# EAGLE board CPU_Board_Layout (EAGLE 7.6.0)
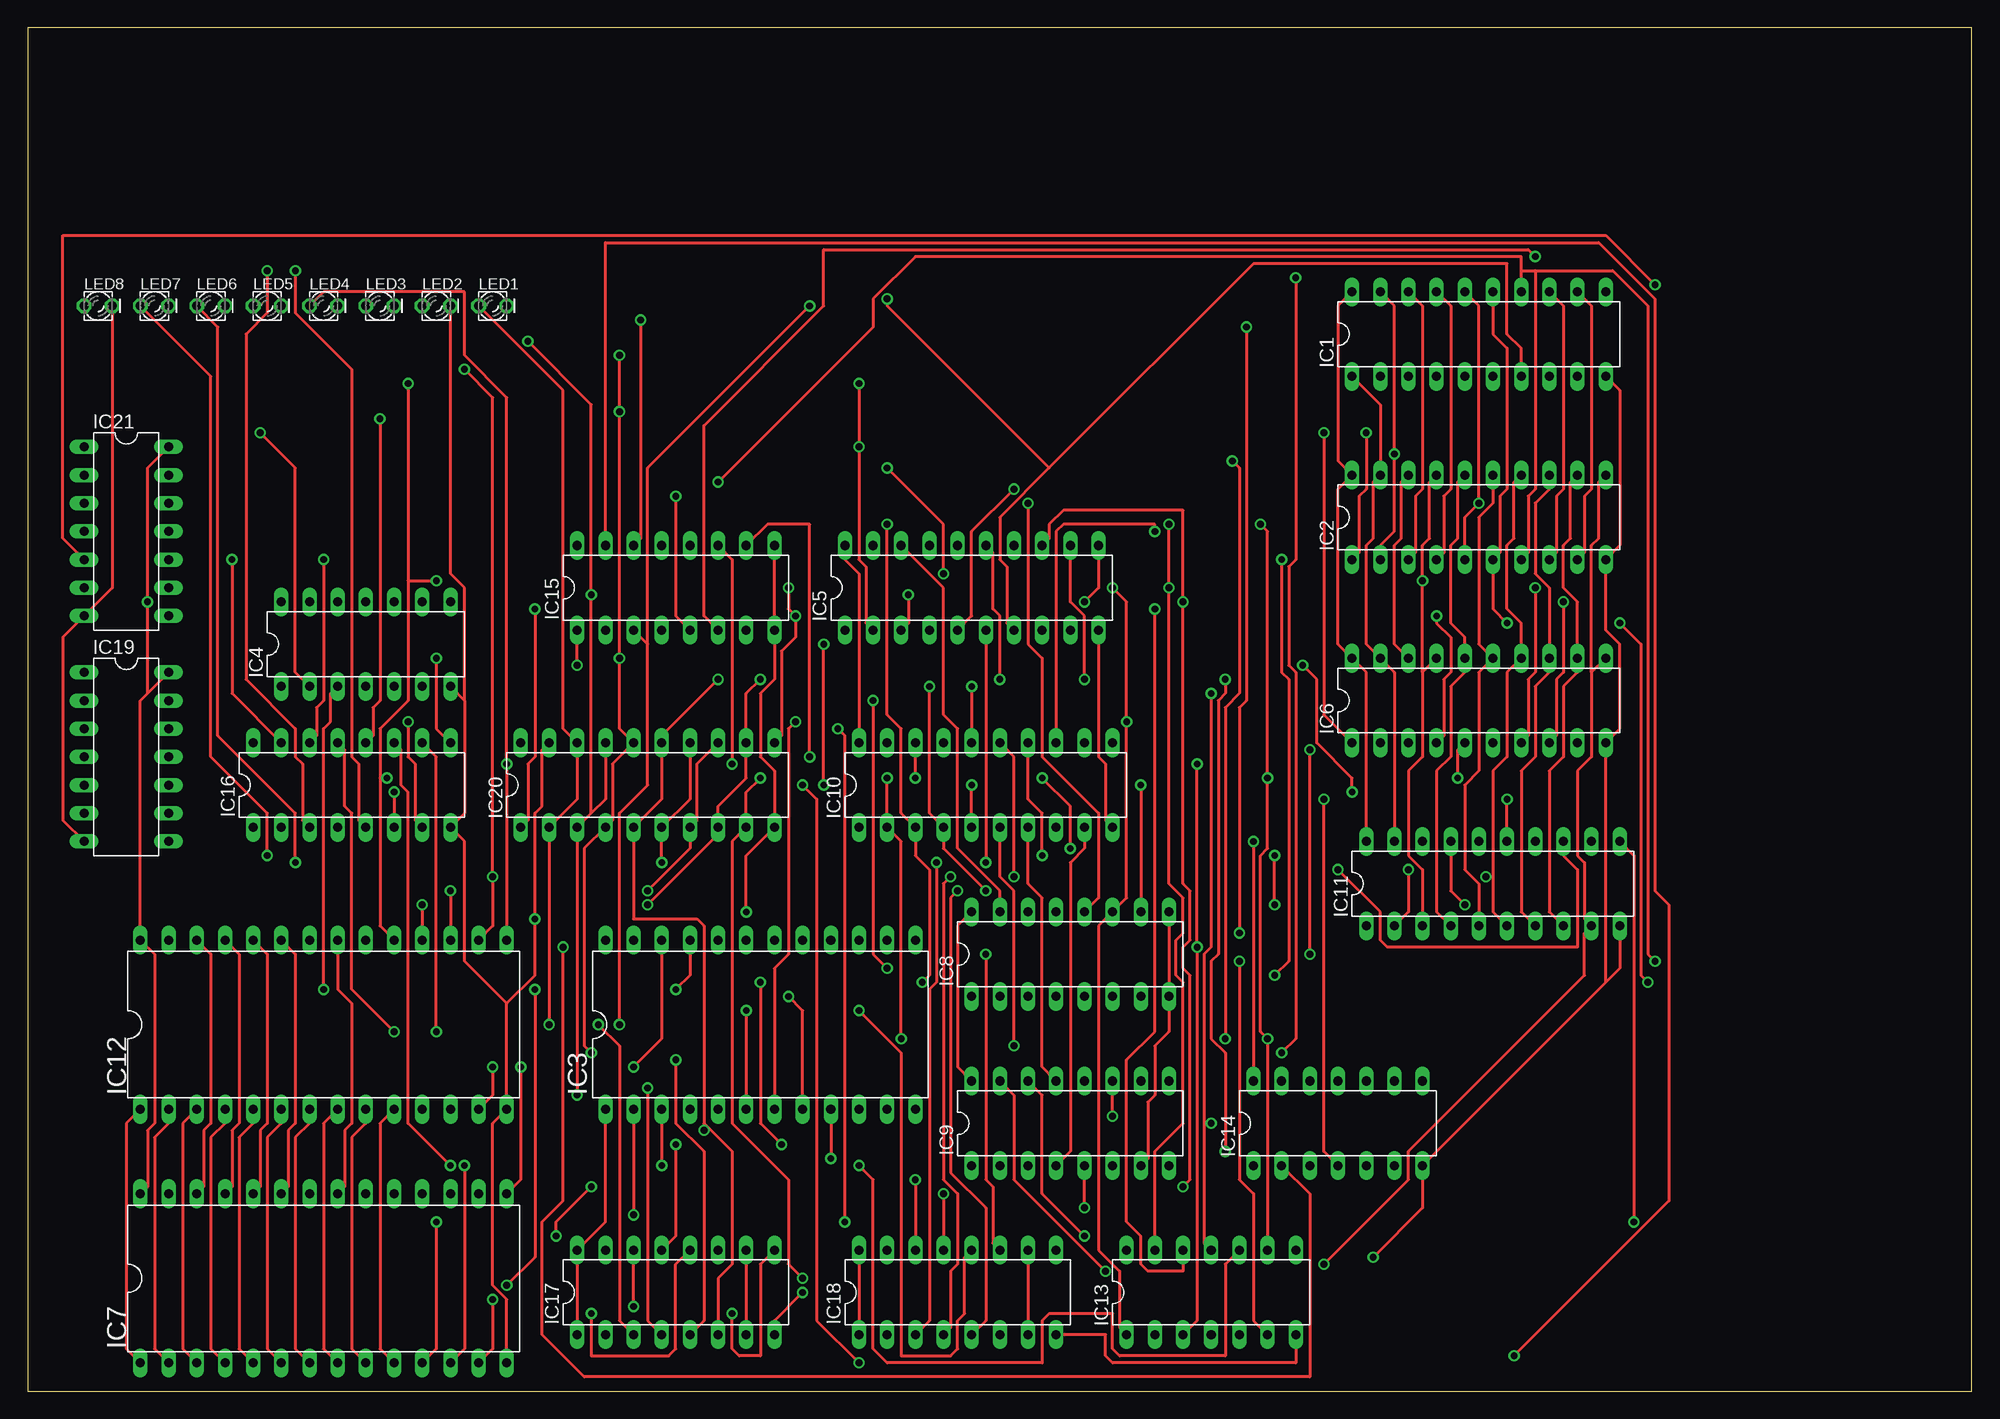
[diagram p0: board, top side]
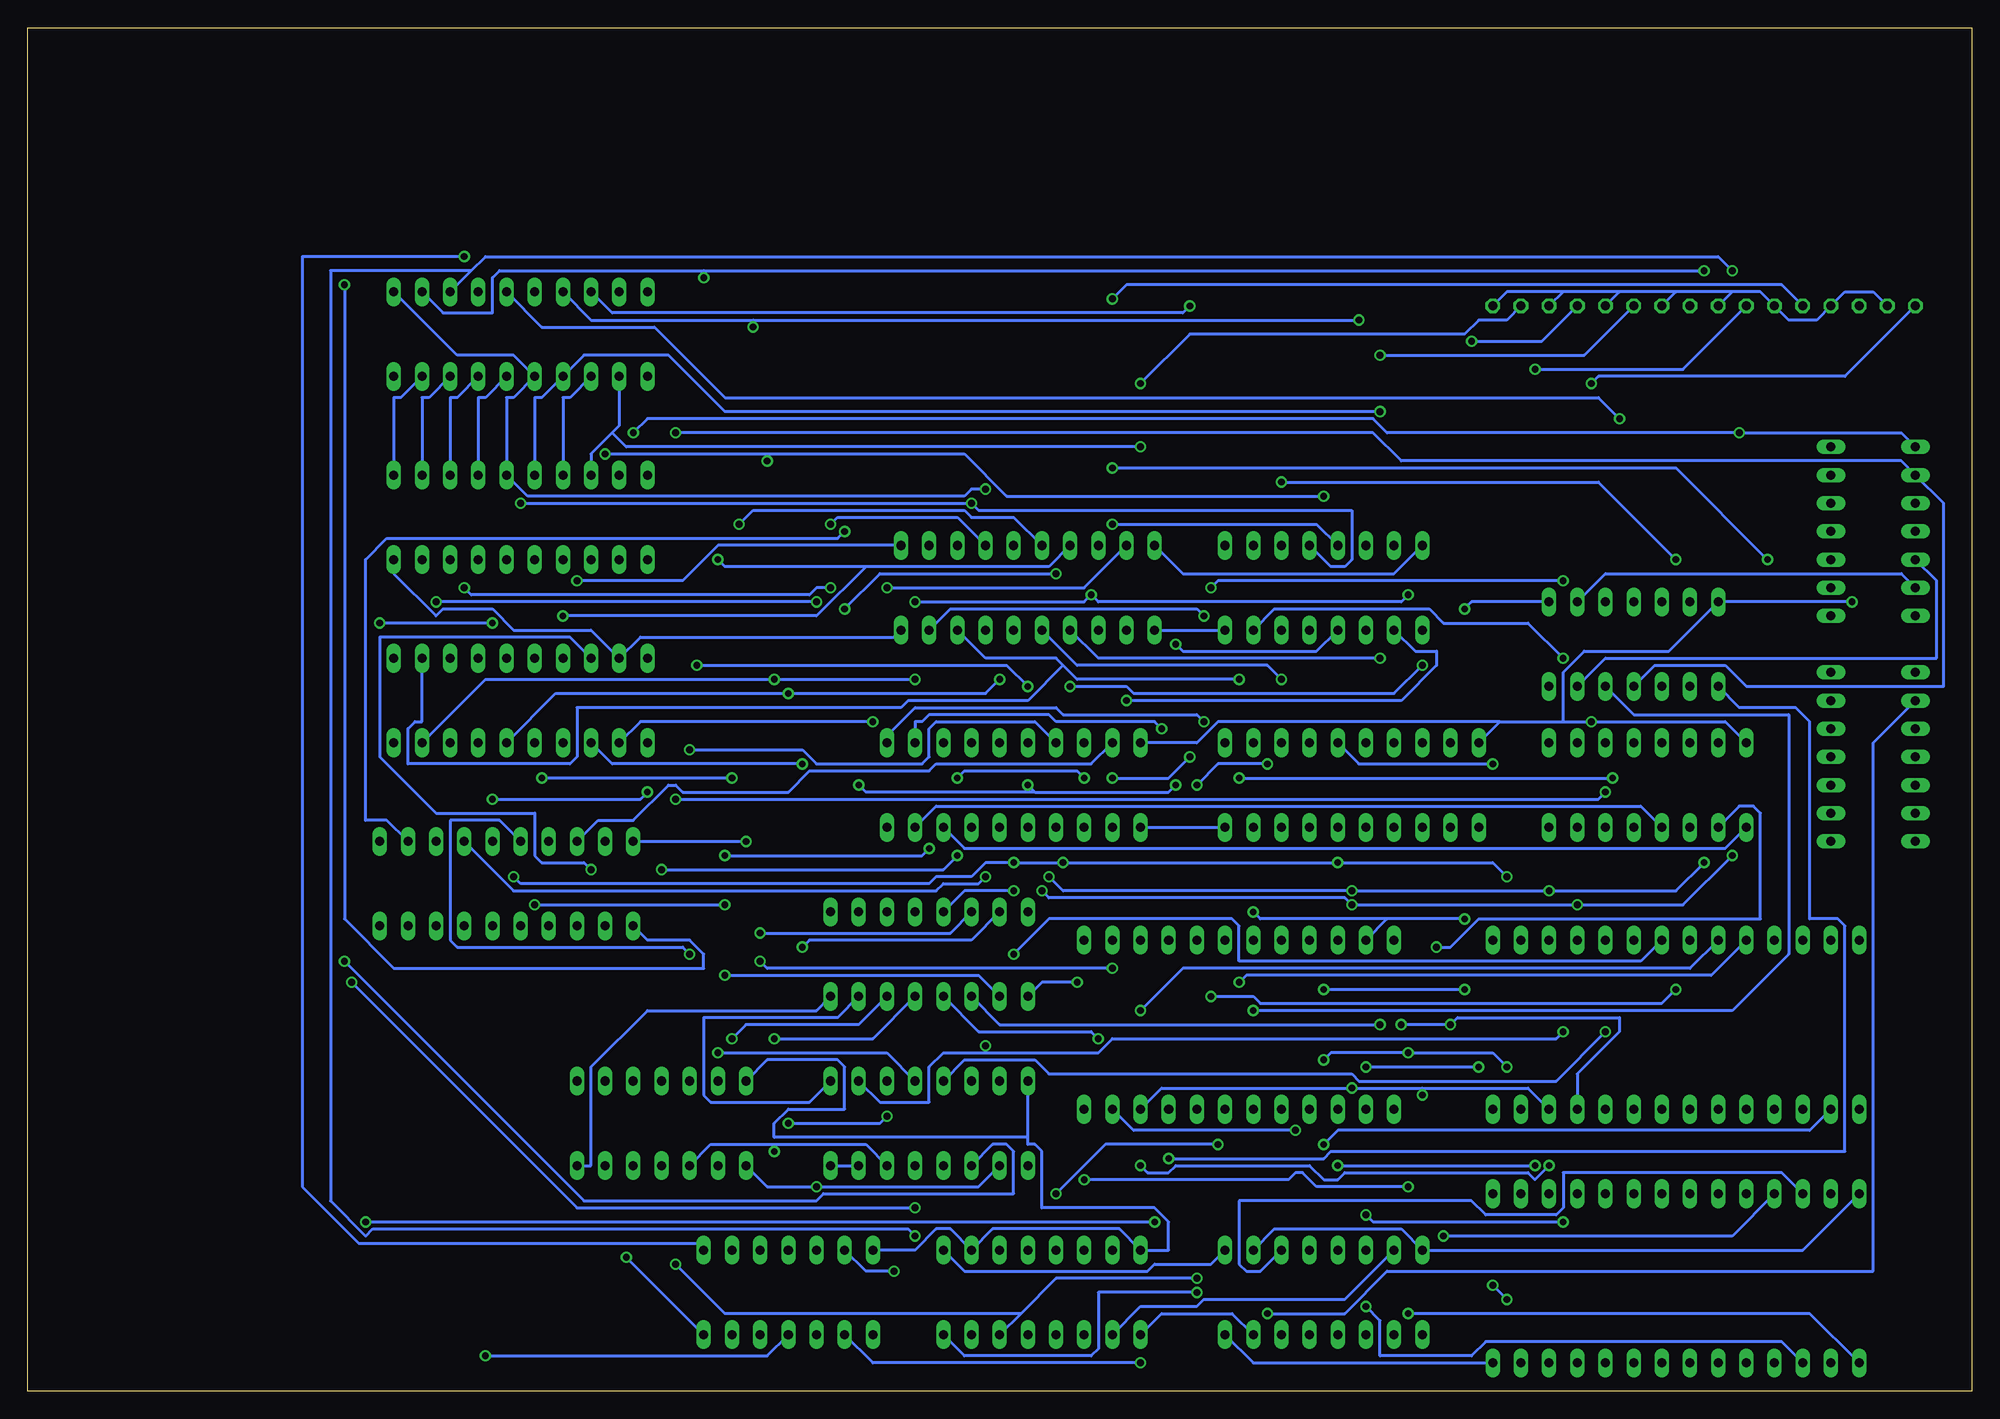
[diagram p1: board, bottom side, seen from below]

Size 175.24 x 122.86 mm. Coordinates in mm from the lower left corner, seen from the top.
Outline: 0,0 175.24,0 175.24,122.86 0,122.86 0,0
Copper layers (1*16): Top 0.035mm / dielectric 1.5mm / Bottom 0.035mm
Design rules "default": minimum track width 10mil, minimum drill 24mil, track to track 8mil, track to pad 8mil, pad to pad 8mil, via to via 8mil, smd to smd 8mil, copper to edge 40mil, drill to drill 8mil, minimum pad ring 10mil, minimum via ring 8mil, stop-mask expansion 4mil, vias tented up to drill 0mil, thermal gap 10mil

## Footprints (pad centres in the part's own frame; a part is rotated, then mirrored left to right if it is on the bottom)
DIL20 = drill 0.813 long: 1 -11.43,-3.81; 2 -8.89,-3.81; 3 -6.35,-3.81; 4 -3.81,-3.81; 5 -1.27,-3.81; 6 1.27,-3.81; 7 3.81,-3.81; 8 6.35,-3.81; 9 8.89,-3.81; 10 11.43,-3.81; 11 11.43,3.81; 12 8.89,3.81; 13 6.35,3.81; 14 3.81,3.81; 15 1.27,3.81; 16 -1.27,3.81; 17 -3.81,3.81; 18 -6.35,3.81; 19 -8.89,3.81; 20 -11.43,3.81
DIL24-6 = drill 0.813 long: 1 -13.97,-7.62; 2 -11.43,-7.62; 3 -8.89,-7.62; 4 -6.35,-7.62; 5 -3.81,-7.62; 6 -1.27,-7.62; 7 1.27,-7.62; 8 3.81,-7.62; 9 6.35,-7.62; 10 8.89,-7.62; 11 11.43,-7.62; 12 13.97,-7.62; 13 13.97,7.62; 14 11.43,7.62; 15 8.89,7.62; 16 6.35,7.62; 17 3.81,7.62; 18 1.27,7.62; 19 -1.27,7.62; 20 -3.81,7.62; 21 -6.35,7.62; 22 -8.89,7.62; 23 -11.43,7.62; 24 -13.97,7.62
DIL14 = drill 0.813 long: 1 -7.62,-3.81; 2 -5.08,-3.81; 3 -2.54,-3.81; 4 0,-3.81; 5 2.54,-3.81; 6 5.08,-3.81; 7 7.62,-3.81; 8 7.62,3.81; 9 5.08,3.81; 10 2.54,3.81; 11 0,3.81; 12 -2.54,3.81; 13 -5.08,3.81; 14 -7.62,3.81
DIL28-6 = drill 0.813 long: 1 -16.51,-7.62; 2 -13.97,-7.62; 3 -11.43,-7.62; 4 -8.89,-7.62; 5 -6.35,-7.62; 6 -3.81,-7.62; 7 -1.27,-7.62; 8 1.27,-7.62; 9 3.81,-7.62; 10 6.35,-7.62; 11 8.89,-7.62; 12 11.43,-7.62; 13 13.97,-7.62; 14 16.51,-7.62; 15 16.51,7.62; 16 13.97,7.62; 17 11.43,7.62; 18 8.89,7.62; 19 6.35,7.62; 20 3.81,7.62; 21 1.27,7.62; 22 -1.27,7.62; 23 -3.81,7.62; 24 -6.35,7.62; 25 -8.89,7.62; 26 -11.43,7.62; 27 -13.97,7.62; 28 -16.51,7.62
DIL16 = drill 0.813 long: 1 -8.89,-3.81; 2 -6.35,-3.81; 3 -3.81,-3.81; 4 -1.27,-3.81; 5 1.27,-3.81; 6 3.81,-3.81; 7 6.35,-3.81; 8 8.89,-3.81; 9 8.89,3.81; 10 6.35,3.81; 11 3.81,3.81; 12 1.27,3.81; 13 -1.27,3.81; 14 -3.81,3.81; 15 -6.35,3.81; 16 -8.89,3.81
LED_LD260 = drill 0.813 octagon: A -1.27,0; K 1.27,0

## Placement (x,y rotation side)
IC1  74HC574N  [DIL20]  130.81,95.25 0 top
IC2  74LS541N  [DIL20]  130.81,78.74 0 top
IC3  4514N  [DIL24-6]  66.04,33.02 0 top
IC4  74LS04N  [DIL14]  30.48,67.31 0 top
IC5  74HC574N  [DIL20]  85.09,72.39 0 top
IC6  74LS541N  [DIL20]  130.81,62.23 0 top
IC7  CY62256LL-PC  [DIL28-6]  26.67,10.16 0 top
IC8  74S283N  [DIL16]  93.98,39.37 0 top
IC9  74S283N  [DIL16]  93.98,24.13 0 top
IC10  74HC574N  [DIL20]  86.36,54.61 0 top
IC11  74LS541N  [DIL20]  132.08,45.72 0 top
IC12  CY62256LL-PC  [DIL28-6]  26.67,33.02 0 top
IC13  74AS04N  [DIL14]  106.68,8.89 0 top
IC14  74AS04N  [DIL14]  118.11,24.13 0 top
IC15  74S283N  [DIL16]  58.42,72.39 0 top
IC16  74S283N  [DIL16]  29.21,54.61 0 top
IC17  [DIL16]  58.42,8.89 0 top
IC18  [DIL16]  83.82,8.89 0 top
IC19  74ALS04N  [DIL14]  8.89,57.15 270 top
IC20  74LS541N  [DIL20]  55.88,54.61 0 top
IC21  74LS08N  [DIL14]  8.89,77.47 270 top
LED1  [LED_LD260]  41.91,97.79 0 top
LED2  [LED_LD260]  36.83,97.79 0 top
LED3  [LED_LD260]  31.75,97.79 0 top
LED4  [LED_LD260]  26.67,97.79 0 top
LED5  [LED_LD260]  21.59,97.79 0 top
LED6  [LED_LD260]  16.51,97.79 0 top
LED7  [LED_LD260]  11.43,97.79 0 top
LED8  [LED_LD260]  6.35,97.79 0 top

## Library data of the parts
IC1 IC2 IC4-IC6 IC8-IC11 IC13-IC16 IC19-IC21 = 74xx-us
IC3 = 45xx
IC7 IC12 = memory-sram
IC17 IC18 = ic-package
LED1-LED8 = eagle-ltspice; SPICEMODEL: NONE; SPICEPREFIX: D; SPICETYPE: diode

## Nets
BUS0: IC1.2 IC2.18 IC5.2 IC6.18 IC11.2 IC12.11 IC17.3 IC20.2 IC20.18 LED1.A
BUS1: IC1.3 IC2.17 IC3.10 IC5.3 IC5.11 IC6.17 IC11.3 IC12.12 IC17.4 IC20.3 IC20.17 LED2.A
BUS2: IC1.4 IC2.16 IC5.4 IC6.16 IC11.4 IC12.13 IC17.5 IC20.4 IC20.16 LED3.A
BUS3: IC1.5 IC1.11 IC2.15 IC3.11 IC5.5 IC6.15 IC11.5 IC12.15 IC17.6 IC20.5 IC20.15 LED4.A
BUS4: IC1.6 IC2.14 IC5.6 IC6.14 IC11.6 IC12.16 IC18.3 IC20.6 IC20.14 LED5.A
BUS5: IC1.7 IC2.13 IC5.7 IC6.13 IC11.7 IC12.17 IC18.4 IC20.7 IC20.13 LED6.A
BUS6: IC1.8 IC2.12 IC5.8 IC6.12 IC11.8 IC12.18 IC18.5 IC20.8 IC20.12 LED7.A
BUS7: IC1.9 IC2.11 IC5.9 IC6.11 IC11.9 IC12.19 IC18.6 IC20.9 IC20.11 LED8.A
GND: IC1.1 IC1.10 IC2.10 IC2.19 IC3.23 IC4.7 IC5.1 IC5.10 IC6.10 IC6.19 IC7.14 IC8.8 IC8.9 IC9.7 IC9.8 IC10.1 IC10.10 IC11.10 IC11.19 IC12.14 IC13.7 IC14.7 IC15.8 IC15.9 IC16.8 IC17.8 IC18.8 IC19.7 IC20.10 IC20.19 IC21.7 LED1.K LED2.K LED3.K LED4.K LED5.K LED6.K LED7.K LED8.K
N$1: IC1.19 IC2.2 IC8.5 IC15.5
N$2: IC1.18 IC2.3 IC8.3 IC15.3
N$3: IC1.17 IC2.4 IC8.14 IC15.14
N$4: IC1.16 IC2.5 IC8.12 IC15.12
N$5: IC1.15 IC2.6 IC9.5 IC16.12
N$6: IC1.14 IC2.7 IC9.3 IC16.14
N$7: IC1.13 IC2.8 IC9.14 IC16.3
N$8: IC1.12 IC2.9 IC9.12 IC16.5
N$9: IC3.2 IC7.11
N$10: IC3.3 IC7.12
N$11: IC3.21 IC7.13
N$12: IC3.22 IC7.15
N$13: IC3.9 IC4.1
N$14: IC2.1 IC4.2 IC21.1
N$15: IC13.2 IC15.11
N$16: IC13.4 IC15.15
N$17: IC5.17 IC6.4 IC8.2
N$18: IC5.16 IC6.5 IC8.6 IC13.9
N$19: IC5.15 IC6.6 IC9.11 IC13.11
N$20: IC5.14 IC6.7 IC9.15 IC13.13
N$21: IC5.13 IC6.8 IC9.2 IC14.1
N$22: IC13.5
N$23: IC4.4 IC6.1 IC21.2
N$24: IC3.8 IC4.3
N$26: IC8.7 IC9.9
N$27: IC8.4 IC10.2 IC15.10
N$28: IC8.1 IC10.3 IC15.13
N$29: IC8.13 IC10.4 IC15.1
N$30: IC8.10 IC10.5 IC15.4
N$31: IC9.10 IC10.6 IC16.10
N$32: IC9.13 IC10.7 IC16.13
N$33: IC10.8 IC16.1
N$34: IC9.4 IC10.9 IC16.4
N$35: IC10.19 IC11.18
N$36: IC10.18 IC11.17
N$37: IC10.17 IC11.16
N$38: IC10.16 IC11.15
N$39: IC10.15 IC11.14
N$40: IC10.14 IC11.13
N$41: IC10.13 IC11.12
N$42: IC10.12 IC11.11
N$43: IC3.7 IC10.11
N$44: IC3.6 IC4.5
N$45: IC4.6 IC11.1 IC21.5
N$46: IC7.21 IC12.21 IC18.11
N$47: IC7.23 IC12.23 IC18.12
N$48: IC7.24 IC12.24 IC18.13
N$49: IC7.25 IC12.25 IC18.14
N$50: IC7.26 IC12.26 IC17.11
N$51: IC7.1 IC12.1 IC17.12
N$52: IC7.2 IC12.2 IC17.13
N$53: IC7.3 IC12.3 IC17.14
N$54: IC7.4 IC12.4
N$55: IC7.5 IC12.5
N$56: IC7.6 IC12.6
N$57: IC7.7 IC12.7
N$58: IC7.8 IC12.8
N$59: IC7.9 IC12.9
N$60: IC7.10 IC12.10
N$61: IC5.18 IC6.3 IC8.15 IC13.3
N$62: IC5.19 IC6.2 IC8.11 IC13.1
N$63: IC13.6 IC15.2
N$64: IC13.8 IC15.6
N$65: IC13.10 IC16.11
N$66: IC13.12 IC16.15
N$67: IC5.12 IC6.9 IC9.6 IC14.3
N$68: IC14.2 IC16.2
N$69: IC14.4 IC16.6
N$70: IC17.2
N$71: IC17.15 IC18.2
N$72: IC3.5
N$73: IC17.9 IC18.9 IC19.2
N$74: IC15.7 IC16.9
N$75: IC4.9 IC21.6
N$78: IC4.8 IC20.1
VCC: IC1.20 IC2.20 IC3.1 IC4.14 IC5.20 IC6.20 IC7.28 IC8.16 IC9.16 IC10.20 IC11.20 IC12.28 IC13.14 IC14.14 IC15.16 IC16.7 IC16.16 IC17.1 IC17.7 IC17.10 IC17.16 IC18.1 IC18.7 IC18.10 IC18.16 IC19.14 IC20.20 IC21.14
VDD: IC3.24
VSS: IC3.12

## Tracks (layer width: path | path; a pad name or v marks a point on that pad's centre or on a via)
BUS0  (via drill 0.61)
  Top 0.254: IC11.2 124.46,43.18 v124.46,46.99 | IC2.18 123.83,81.92 123.83,76.83 123.19,76.2 123.19,67.31 IC6.18 | v46.99,33.02 IC20.2 49.53,53.34 IC20.18 48.26,59.69 48.26,90.17 LED1.A | IC17.3 53.34,6.35 53.34,31.11 v51.44,33.02 | IC5.2 75.56,69.22 75.56,74.3 74.93,74.93 v74.93,85.09 v74.93,90.81
  Bottom 0.254: IC2.18 124.46,84.45 122.55,86.36 | 122.55,86.36 121.92,87 IC1.2 | v124.46,46.99 125.09,47.62 128.91,47.62 129.54,48.26 129.54,52.07 138.43,52.07 143.51,57.15 143.51,67.94 126.36,67.94 IC6.18 | IC12.11 35.56,28.57 31.75,32.38 31.75,33.66 46.36,33.66 v46.99,33.02 v51.44,33.02 | v74.93,90.81 70.48,95.25 45.72,95.25 44.45,96.52 41.91,96.52 LED1.A | 122.55,86.36 121.28,85.09 v74.93,85.09
BUS1  (via drill 0.61)
  Top 0.254: IC17.4 55.88,6.35 v55.88,27.3 | IC11.3 125.73,46.99 124.46,48.26 124.46,55.88 125.73,57.15 125.73,64.77 | IC6.17 125.73,64.77 | IC2.17 126.36,81.92 126.36,76.83 125.73,76.2 v125.73,73.03 125.73,64.77 | IC5.3 79.38,69.22 v79.38,71.75 | v95.25,71.12 96.52,72.39 IC5.11 | 50.8,52.07 52.07,53.34 IC20.17 | 50.8,52.07 IC20.3 v49.53,26.67 | v45.09,94.61 50.8,88.9 v50.8,71.75 50.8,52.07
  Bottom 0.254: IC12.12 40.01,27.3 49.53,27.3 | 49.53,27.3 v55.88,27.3 73.02,27.3 IC3.10 | IC2.17 127,89.53 126.36,89.53 IC1.3 | v95.25,71.12 80.01,71.12 v79.38,71.75 78.74,71.12 51.44,71.12 v50.8,71.75 | LED2.A 38.74,94.61 v45.09,94.61 | v125.73,73.03 116.2,73.03 113.03,76.2 IC5.11 | v49.53,26.67 49.53,27.3
BUS2  (via drill 0.61)
  Top 0.254: IC12.13 41.91,26.67 v41.91,29.21 | v50.8,30.48 50.17,31.11 50.17,48.9 IC20.4 52.71,51.44 52.71,56.52 IC20.16 53.34,59.69 v53.34,66.04 v53.34,88.27 v53.34,93.34 | IC17.5 60.96,6.35 60.96,21.59 58.42,24.13 v58.42,29.84 | IC11.4 127,43.18 127,55.88 128.27,57.15 128.27,63.5 129.54,64.77 IC6.16 129.54,67.94 128.27,69.22 128.27,76.2 128.91,76.83 128.91,81.92 IC2.16
  Bottom 0.254: v41.91,29.21 43.18,30.48 v50.8,30.48 57.79,30.48 v58.42,29.84 | IC2.16 129.54,89.53 128.91,89.53 IC1.4 125.09,93.34 117.47,93.34 112.39,88.27 v53.34,88.27 | LED3.A 34.93,93.34 v53.34,93.34 | IC5.4 78.74,66.04 v53.34,66.04
BUS3  (via drill 0.61)
  Top 0.254: IC11.5 130.81,45.72 129.54,46.99 129.54,54.61 130.81,55.88 130.81,64.77 IC6.15 130.81,67.31 130.81,78.74 132.08,80.01 IC2.15 | IC12.15 v43.18,56.52 43.18,89.53 39.37,93.34 39.37,99.06 26.67,99.06 LED4.A | IC17.6 62.23,10.16 63.5,11.43 63.5,21.59 60.96,24.13 | 60.96,24.13 60.96,41.91 60.33,42.55 54.61,42.55 IC20.5 57.15,53.34 IC20.15 57.15,59.05 v62.23,64.14 | 60.96,24.13 v60.96,23.5 | v88.9,81.28 85.09,77.47 85.09,69.85 IC5.5
  Bottom 0.254: IC1.11 136.53,93.34 131.45,93.34 IC1.5 131.45,89.53 132.08,89.53 IC2.15 130.18,80.64 90.8,80.64 90.17,81.28 v88.9,81.28 | v43.18,56.52 55.25,56.52 IC20.15 | IC3.11 75.56,23.5 v60.96,23.5 | IC5.5 80.64,65.41 63.5,65.41 v62.23,64.14
BUS4  (via drill 0.61)
  Top 0.254: IC11.6 132.08,43.18 132.08,46.35 | 132.08,46.35 132.08,55.88 133.35,57.15 133.35,64.77 IC6.14 134.62,69.22 133.35,70.48 133.35,76.2 133.99,76.83 133.99,81.92 IC2.14 | IC20.14 59.69,53.34 IC20.6 v57.15,47.62 | IC18.3 81.28,6.35 81.28,36.2 81.91,36.83 v81.91,47.62 | IC5.6 v86.36,47.62 | IC12.16 41.91,41.91 v41.91,46.35 41.91,89.53 v39.37,92.08 | v131.45,46.35 132.08,46.35
  Bottom 0.254: IC2.14 134.62,89.53 133.99,89.53 IC1.6 | v41.91,46.35 43.18,47.62 v57.15,47.62 v81.91,47.62 v86.36,47.62 88.9,47.62 90.17,46.35 93.34,46.35 93.98,45.72 130.81,45.72 v131.45,46.35 | LED5.A 26.04,92.08 v39.37,92.08
BUS5  (via drill 0.61)
  Top 0.254: IC11.7 134.62,43.18 134.62,55.88 135.89,57.15 135.89,63.5 137.16,64.77 IC6.13 137.16,72.39 135.89,73.66 135.89,80.01 137.16,81.28 IC2.13 | IC5.7 88.27,69.22 88.27,74.3 87.63,74.93 87.63,78.74 92.08,83.19 | 92.08,83.19 110.49,101.6 133.35,101.6 133.35,95.25 134.62,93.98 IC1.7 | v38.1,45.09 IC12.17 | v55.88,45.09 59.69,48.9 IC20.7 60.33,51.44 60.33,56.52 IC20.13 | IC18.4 83.19,5.71 83.19,10.79 83.82,11.43 83.82,17.78 82.55,19.05 82.55,45.72 v83.19,46.35 | LED6.A 17.14,95.89 17.14,59.05 24.13,52.07 v24.13,47.62 | 92.08,83.19 77.47,97.79 v77.47,98.42
  Bottom 0.254: IC2.13 137.16,89.53 136.53,89.53 IC1.7 | v83.19,46.35 81.91,45.09 v55.88,45.09 v38.1,45.09 26.67,45.09 v24.13,47.62 | v77.47,98.42 76.2,99.69 17.14,99.69 LED6.A
BUS6  (via drill 0.61)
  Top 0.254: IC11.8 137.16,43.18 137.16,55.88 138.43,57.15 138.43,63.5 139.7,64.77 IC6.12 139.7,71.12 138.43,72.39 138.43,76.2 139.06,76.83 139.06,81.92 IC2.12 | v35.56,43.81 IC12.18 | v55.88,43.81 62.23,50.16 IC20.8 62.23,52.7 64.77,55.24 IC20.12 64.77,62.87 v66.04,64.14 | IC18.5 86.36,6.35 86.36,16.51 83.19,19.68 83.19,44.45 v83.82,45.09 | LED7.A 16.51,91.44 16.51,57.15 21.59,52.07 v21.59,48.26
  Bottom 0.254: IC2.12 139.7,89.53 139.06,89.53 IC1.8 | v83.82,45.09 83.19,44.45 56.52,44.45 v55.88,43.81 v35.56,43.81 26.04,43.81 v21.59,48.26 | IC5.8 88.9,66.04 82.55,66.04 81.91,65.41 | 81.91,65.41 80.64,64.14 v66.04,64.14 | IC6.12 139.7,60.33 140.34,60.33 140.97,59.69 140.97,56.52 126.36,56.52 125.73,57.15 125.73,61.59 96.52,61.59 95.88,62.23 85.09,62.23 81.91,65.41
BUS7  (via drill 0.61)
  Top 0.254: IC20.11 67.94,59.05 67.94,66.67 69.21,67.94 v69.21,69.85 68.58,70.48 v68.58,72.39 | IC12.19 31.75,41.91 31.75,55.24 | 31.75,55.24 31.75,59.69 34.29,62.23 34.29,73.03 | v34.29,90.81 34.29,73.03 | 34.29,73.03 v36.83,73.03 | 140.97,64.77 140.97,57.15 139.7,55.88 139.7,48.26 140.34,47.62 140.34,42.55 IC11.9 140.34,41.27 140.34,37.47 124.46,21.59 124.46,19.05 v116.84,11.43 | IC6.11 140.97,64.77 | IC2.11 141.61,81.92 141.61,76.83 140.97,76.2 140.97,64.77 | v69.85,10.16 68.58,11.43 68.58,19.05 63.5,24.13 63.5,49.53 IC20.9 64.77,53.98 v66.04,55.24 | v32.38,55.24 31.75,55.24
  Bottom 0.254: v69.21,69.85 69.85,70.48 92.08,70.48 IC5.9 | v34.29,90.81 33.66,91.44 11.43,91.44 LED8.A | v68.58,72.39 67.94,73.03 v36.83,73.03 | IC2.11 142.24,89.53 141.61,89.53 IC1.9 | 85.72,6.99 82.55,10.16 v69.85,10.16 | 85.72,6.99 IC18.6 | v116.84,11.43 112.39,6.99 85.72,6.99 | v66.04,55.24 v32.38,55.24
GND  (via drill 0.61)
  Top 0.254: IC10.10 97.16,51.44 97.16,56.52 96.52,57.15 IC5.10 | IC1.1 121.92,88.9 IC2.19 121.28,81.92 121.28,76.83 120.65,76.2 120.65,67.31 IC6.19 123.19,64.77 IC11.19 | IC8.9 IC8.8 102.87,32.38 101.6,31.11 101.6,26.67 100.96,26.04 100.96,20.95 IC9.7 | IC18.8 97.16,5.08 97.16,3.17 97.79,2.54 114.3,2.54 IC13.7 | IC1.10 143.51,90.17 143.51,76.2 IC2.10 142.24,68.58 143.51,67.31 143.51,59.69 IC6.10 142.24,36.83 | 142.24,36.83 143.51,38.1 IC11.10 | 142.24,36.83 IC14.7 125.73,16.51 v121.28,12.06 | IC19.7 3.17,51.44 3.17,67.94 IC21.7 7.62,72.39 LED8.K | IC15.9 IC15.8 67.31,64.14 66.04,62.87 66.04,57.15 67.31,55.88 IC20.10 64.77,48.26 v64.77,43.18 | 39.37,62.23 39.37,52.07 IC16.8 39.37,49.53 39.37,38.73 43.18,34.92 | IC4.7 39.37,62.23 | IC7.14 43.18,8.26 41.91,9.53 41.91,24.13 IC12.14 43.18,34.92 | IC20.19 46.36,57.78 46.36,52.7 45.72,52.07 v45.72,42.55 45.72,37.47 43.18,34.92 | LED2.K 38.1,73.66 39.37,72.39 39.37,62.23 | v69.85,8.89 67.31,6.35 IC17.8
  Bottom 0.254: IC5.10 97.16,67.94 120.02,67.94 IC6.19 124.46,68.58 131.45,68.58 133.35,70.48 137.8,70.48 138.43,69.85 142.24,73.66 IC2.10 | IC9.8 IC9.7 | v121.28,12.06 IC13.7 | IC8.8 104.14,34.29 119.38,34.29 124.46,29.21 124.46,20.32 IC14.7 | LED8.K 8.89,99.06 11.43,99.06 LED7.K 13.97,96.52 16.51,96.52 LED6.K 19.05,99.06 21.59,99.06 | 21.59,99.06 LED5.K | 26.67,99.06 LED4.K | 21.59,99.06 26.67,99.06 | 31.75,99.06 LED3.K | 26.67,99.06 31.75,99.06 | 36.83,99.06 LED2.K | 31.75,99.06 36.83,99.06 | LED1.K 41.91,99.06 36.83,99.06 | IC10.1 IC20.10 | IC5.1 IC15.8 | IC7.14 64.77,2.54 IC17.8 | 52.71,42.55 IC3.23 | v45.72,42.55 52.71,42.55 | v64.77,43.18 64.14,42.55 52.71,42.55 | IC18.8 90.8,3.17 79.38,3.17 78.74,3.81 78.74,8.89 v69.85,8.89
N$1  (via drill 0.61)
  Top 0.254: IC15.5 58.42,69.85 v58.42,80.64 | IC2.2 121.92,76.2 123.19,77.47 v123.19,84.45 123.19,97.79 IC1.19 | v107.95,31.75 107.95,61.59 109.22,62.87 109.22,83.19 v108.58,83.82
  Bottom 0.254: v58.42,80.64 86.99,80.64 90.8,84.45 108.58,84.45 | v123.19,84.45 108.58,84.45 | IC8.5 99.06,31.75 v107.95,31.75 | 108.58,84.45 v108.58,83.82
N$2  (via drill 0.61)
  Top 0.254: IC2.3 125.09,75.56 125.09,80.64 125.73,81.28 125.73,97.79 IC1.18 | 55.88,67.31 IC15.3 | 55.88,67.31 55.88,54.61 53.34,52.07 v53.34,33.02 | v70.48,97.79 55.88,83.19 55.88,67.31
  Bottom 0.254: v53.34,33.02 87.63,33.02 IC8.3 | IC1.18 122.55,97.16 71.12,97.16 v70.48,97.79
N$3  (via drill 0.61)
  Top 0.254: IC15.14 55.25,76.83 v55.25,96.52 | v109.22,41.27 109.22,61.59 109.85,62.23 v109.85,95.89 | IC2.4 127.63,75.56 127.63,80.64 128.27,81.28 128.27,97.79 IC1.17
  Bottom 0.254: 109.85,96.52 124.46,96.52 IC1.17 | 109.85,96.52 v55.25,96.52 | IC8.14 92.08,41.27 v109.22,41.27 | 109.85,96.52 v109.85,95.89
N$4  (via drill 0.61)
  Top 0.254: IC2.5 129.54,78.74 v130.81,80.01 130.81,97.79 IC1.16 | IC8.12 96.52,44.45 96.52,52.07 91.44,57.15 91.44,66.04 90.17,67.31 v90.17,80.01
  Bottom 0.254: IC15.12 57.79,74.3 56.52,74.3 55.88,74.93 55.88,79.38 89.53,79.38 v90.17,80.01 v130.81,80.01
N$5  (via drill 0.61)
  Top 0.254: v95.25,16.51 IC9.5 | v146.05,36.83 145.42,37.47 145.42,67.31 v143.51,69.22 | v133.35,69.22 132.08,70.48 IC2.6 132.72,75.56 132.72,80.64 133.35,81.28 133.35,93.98 132.08,95.25 IC1.15 | IC16.12 31.11,59.05 31.11,61.59 31.75,62.23 v31.75,87.63
  Bottom 0.254: v95.25,16.51 125.73,16.51 v146.05,36.83 | v133.35,69.22 v143.51,69.22 | v31.75,87.63 33.66,89.53 112.39,89.53 118.74,95.89 128.91,95.89 IC1.15
N$6  (via drill 0.61)
  Top 0.254: IC16.14 26.04,59.05 26.04,61.59 26.67,62.23 v26.67,74.93 | v62.23,81.92 76.2,95.89 76.2,98.42 80.01,102.23 134.62,102.23 134.62,100.97 | IC1.14 134.62,100.97 | v146.69,38.73 146.05,39.37 146.05,97.79 142.88,100.97 135.89,100.97 | 134.62,100.97 135.89,100.97 | IC2.7 135.26,75.56 135.26,80.64 135.89,81.28 135.89,100.97
  Bottom 0.254: v26.67,74.93 33.66,81.92 v62.23,81.92 | IC9.3 88.27,22.23 86.99,22.23 86.36,21.59 86.36,17.78 103.5,17.78 104.14,17.14 125.09,17.14 v146.69,38.73
N$7  (via drill 0.61)
  Top 0.254: IC16.3 24.77,51.44 24.77,56.52 24.13,57.15 24.13,59.69 19.68,64.14 19.68,95.25 21.59,97.16 v21.59,100.97 | IC9.14 91.44,26.67 91.44,17.78 v95.25,13.97 | IC2.8 137.8,75.56 137.8,80.64 138.43,81.28 138.43,97.79 IC1.13
  Bottom 0.254: v21.59,100.97 22.86,102.23 133.99,102.23 135.26,100.97 | IC1.13 135.26,100.97 | v95.25,13.97 95.88,14.61 144.15,14.61 144.78,13.97 147.96,17.14 147.96,100.97 135.26,100.97
N$8  (via drill 0.61)
  Top 0.254: IC16.5 29.84,51.44 29.84,56.52 29.21,57.15 29.21,92.08 24.13,97.16 v24.13,100.97 | v113.03,30.48 114.3,31.75 114.3,64.77 113.66,65.41 113.66,74.3 114.3,74.93 v114.3,100.33 | IC2.9 140.34,75.56 140.34,80.64 140.97,81.28 140.97,97.79 IC1.12
  Bottom 0.254: 114.3,100.97 132.72,100.97 133.35,100.33 133.35,97.16 137.8,97.16 IC1.12 | 114.3,100.97 v24.13,100.97 | IC9.12 97.79,30.48 v113.03,30.48 | 114.3,100.97 v114.3,100.33
N$9  (via drill 0.61)
  Top 0.254: IC7.11 36.83,3.81 v36.83,15.24 | IC3.2 v54.61,15.88
  Bottom 0.254: v36.83,15.24 53.98,15.24 v54.61,15.88
N$10  (via drill 0.61)
  Top 0.254: IC7.12 39.37,3.81 v39.37,20.32 | IC3.3 v57.15,20.32
  Bottom 0.254: v57.15,20.32 v39.37,20.32
N$11  (via drill 0.61)
  Top 0.254: IC7.13 41.91,3.81 v41.91,8.26 | v43.18,9.53 45.72,12.06 v45.72,36.2 | v58.42,36.2 59.69,37.47 IC3.21
  Bottom 0.254: v43.18,9.53 v41.91,8.26 | v58.42,36.2 v45.72,36.2
N$12  (via drill 0.61)
  Top 0.254: IC7.15 44.45,19.05 v44.45,29.21 | v54.61,29.21 57.15,31.75 IC3.22
  Bottom 0.254: v54.61,29.21 v44.45,29.21
N$13  (via drill 0.61)
  Top 0.254: IC3.9 v72.39,20.95
  Bottom 0.254: IC4.1 20.95,61.59 15.88,61.59 14.61,60.33 14.61,42.55 12.06,42.55 11.43,41.91 11.43,21.59 57.79,21.59 58.42,20.95 v72.39,20.95
N$14  (via drill 0.61)
  Top 0.254: v20.95,86.36 24.13,83.19 24.13,64.77 IC4.2 | IC2.1 120.02,75.56 120.02,80.64 120.65,81.28 v120.65,86.36
  Bottom 0.254: IC21.1 6.35,86.36 v20.95,86.36 52.71,86.36 53.98,87.63 119.38,87.63 v120.65,86.36
N$15  (via drill 0.61)
  Top 0.254: v74.93,2.54 71.12,6.35 71.12,53.34 v69.85,54.61 | v63.5,56.52 63.5,74.93 IC15.11
  Bottom 0.254: IC13.2 99.06,2.54 v74.93,2.54 | v69.85,54.61 67.94,56.52 v63.5,56.52
N$16  (via drill 0.61)
  Top 0.254: v133.99,3.17 147.96,17.14 147.96,43.81 146.69,45.09 146.69,98.42 141.61,103.5 52.07,103.5 IC15.15
  Bottom 0.254: IC13.4 108.58,3.17 v133.99,3.17
N$17  (via drill 0.61)
  Top 0.254: v112.39,37.47 113.66,38.73 113.66,64.14 113.03,64.77 v113.03,74.93 | IC6.4 127.63,59.05 127.63,64.14 128.27,64.77 128.27,67.94 127,69.22 v127,69.85
  Bottom 0.254: IC8.2 89.53,37.47 v112.39,37.47 | v113.03,74.93 112.39,74.3 99.69,74.3 | 99.69,74.3 83.19,74.3 IC5.17 | v127,69.85 104.14,69.85 99.69,74.3
N$18  (via drill 0.61)
  Top 0.254: IC13.9 v111.76,31.75 111.12,32.38 111.12,48.26 111.76,48.9 v111.76,55.24 111.76,77.47 v111.12,78.11 | IC6.5 128.91,57.78 v128.91,55.24
  Bottom 0.254: v111.76,31.75 110.49,33.02 100.33,33.02 IC8.6 | IC5.16 86.36,78.74 90.17,78.74 90.8,79.38 109.85,79.38 v111.12,78.11 | v111.76,55.24 v128.91,55.24
N$19  (via drill 0.61)
  Top 0.254: IC5.15 86.99,75.56 86.99,70.48 87.63,69.85 v87.63,64.14 | IC13.11 106.05,13.34 106.05,24.13 | 106.05,24.13 106.05,39.37 106.68,40.01 v106.68,62.87 | v97.79,24.77 IC9.11 | 106.05,24.13 v106.68,24.13
  Bottom 0.254: v87.63,64.14 88.9,62.87 v106.68,62.87 127.63,62.87 IC6.6 | v97.79,24.77 98.42,24.13 v106.68,24.13
N$20  (via drill 0.61)
  Top 0.254: v97.16,10.79 88.9,19.05 88.9,26.67 IC9.15 | v102.87,78.11 v102.87,72.39 102.87,45.72 104.14,44.45 104.14,41.27 103.5,40.64 103.5,37.47 104.14,36.83 104.14,24.13 101.6,21.59 IC13.13 | IC6.7 135.26,59.05 135.26,64.14 135.89,64.77 v135.89,72.39
  Bottom 0.254: IC13.13 99.69,10.79 v97.16,10.79 | IC5.14 91.44,78.74 102.23,78.74 v102.87,78.11 | v135.89,72.39 135.26,71.75 104.77,71.75 104.14,72.39 v102.87,72.39
N$21  (via drill 0.61)
  Top 0.254: IC5.13 92.08,76.83 92.08,78.11 93.34,79.38 104.14,79.38 v104.14,71.12 104.14,45.72 104.77,45.09 104.77,40.64 104.14,40.01 104.14,38.1 104.77,37.47 104.77,19.05 v104.14,18.41 | IC6.8 137.8,59.05 137.8,64.14 138.43,64.77 v138.43,71.12
  Bottom 0.254: IC9.2 89.53,18.41 v104.14,18.41 108.58,18.41 IC14.1 | v104.14,71.12 v138.43,71.12
N$23  (via drill 0.61)
  Top 0.254: IC6.1 116.84,60.96 v116.84,86.36
  Bottom 0.254: IC4.4 28.57,65.41 22.22,65.41 20.32,63.5 2.54,63.5 2.54,80.01 IC21.2 6.35,83.82 51.44,83.82 53.98,86.36 v116.84,86.36
N$24  (via drill 0.61)
  Top 0.254: IC4.3 27.3,62.87 27.3,60.33 26.67,59.69 v26.67,36.2 | v68.58,35.56 69.85,34.29 IC3.8
  Bottom 0.254: v26.67,36.2 27.94,34.92 64.14,34.92 64.77,35.56 v68.58,35.56
N$26
  Bottom 0.254: IC9.9 104.77,26.04 113.66,26.04 114.3,26.67 114.3,33.66 102.23,33.66 IC8.7
N$27  (via drill 0.61)
  Top 0.254: v78.74,31.75 78.74,49.53 IC10.2 v77.47,55.24 | IC15.10 66.67,78.11 70.48,78.11 v70.48,57.15
  Bottom 0.254: v78.74,31.75 79.38,32.38 89.53,32.38 IC8.4 | v70.48,57.15 72.39,55.24 v77.47,55.24
N$28  (via drill 0.61)
  Top 0.254: v80.64,36.83 81.28,37.47 81.28,46.99 80.01,48.26 IC10.3 78.74,52.07 78.74,59.69 77.47,60.96 v77.47,78.11
  Bottom 0.254: IC8.1 83.82,36.83 v80.64,36.83 | IC15.13 59.05,78.11 v77.47,78.11
N$29  (via drill 0.61)
  Top 0.254: v49.53,65.41 IC15.1 | v81.28,63.5 81.28,52.07 IC10.4 82.55,48.9 v86.36,45.09
  Bottom 0.254: v49.53,65.41 52.07,62.87 75.56,62.87 76.2,63.5 v81.28,63.5 | IC8.13 90.8,45.09 v86.36,45.09
N$30  (via drill 0.61)
  Top 0.254: v71.75,54.61 v71.75,67.31 | IC10.5 v85.09,54.61 | v100.33,54.61 IC8.10
  Bottom 0.254: IC15.4 59.05,66.67 71.12,66.67 v71.75,67.31 | v71.75,54.61 72.39,53.98 84.45,53.98 | v85.09,54.61 84.45,53.98 | v100.33,54.61 99.69,53.98 84.45,53.98
N$31  (via drill 0.61)
  Top 0.254: IC16.10 36.83,57.15 v36.83,32.38 | IC10.6 87.63,46.35 88.9,45.09 v88.9,31.11
  Bottom 0.254: v36.83,32.38 37.47,31.75 77.47,31.75 78.74,30.48 88.9,30.48 | 88.9,30.48 92.71,30.48 93.98,29.21 93.98,26.04 98.42,26.04 IC9.10 | 88.9,30.48 v88.9,31.11
N$32  (via drill 0.61)
  Top 0.254: IC16.13 28.57,57.78 28.57,52.7 29.21,52.07 29.21,36.2 v33.02,32.38 | IC10.7 90.17,45.72 91.44,44.45 91.44,29.21 IC9.13
  Bottom 0.254: v33.02,32.38 37.47,27.94 55.25,27.94 55.88,28.57 83.19,28.57 84.45,29.84 90.8,29.84 IC9.13
N$33
  Bottom 0.254: IC16.1 22.22,48.9 90.8,48.9 IC10.8
N$34
  Top 0.254: IC9.4 93.98,21.59 93.98,47.62 95.25,48.9 IC10.9
  Bottom 0.254: IC16.4 29.84,52.7 93.34,52.7 IC10.9
N$35
  Bottom 0.254: IC10.19 79.38,56.52 93.34,56.52 93.98,55.88 104.77,55.88 106.68,53.98 116.2,53.98 116.84,54.61 117.47,54.61 120.65,51.44 123.83,51.44 IC11.18
N$36  (via drill 0.61)
  Top 0.254: v80.01,55.24 IC10.18 | v91.44,55.24 93.98,52.7 v93.98,48.9 | v112.39,43.81 v112.39,48.26 | v129.54,43.81 128.27,45.09 IC11.17
  Bottom 0.254: v80.01,55.24 80.64,55.88 90.8,55.88 v91.44,55.24 | v93.98,48.9 94.61,48.26 v112.39,48.26 | v129.54,43.81 v112.39,43.81
N$37  (via drill 0.61)
  Top 0.254: v115.57,39.37 v115.57,57.78
  Bottom 0.254: IC10.17 84.45,60.33 93.34,60.33 93.98,59.69 93.98,57.15 94.61,56.52 104.14,56.52 105.41,57.78 v115.57,57.78 | v115.57,39.37 116.2,40.01 136.53,40.01 137.16,40.64 137.16,51.44 132.72,51.44 IC11.16
N$38  (via drill 0.61)
  Top 0.254: v85.09,63.5 IC10.16 | v114.94,65.41 116.2,64.14 116.2,58.42 119.38,55.24 v119.38,53.98 | IC11.15 v133.35,53.34
  Bottom 0.254: v85.09,63.5 86.99,65.41 v114.94,65.41 | v119.38,53.98 120.02,53.34 v133.35,53.34
N$39  (via drill 0.61)
  Top 0.254: IC10.15 88.9,57.15 v88.9,46.35
  Bottom 0.254: v88.9,46.35 89.53,45.72 92.71,45.72 93.34,45.09 131.45,45.09 IC11.14
N$40  (via drill 0.61)
  Top 0.254: IC10.14 90.17,53.34 91.44,52.07 v91.44,48.26 | v118.11,46.99 121.92,43.18 121.92,40.64 122.55,40.01 139.7,40.01 139.7,46.99 138.43,48.26 IC11.13
  Bottom 0.254: v91.44,48.26 92.71,46.99 v118.11,46.99
N$41  (via drill 0.61)
  Top 0.254: IC10.13 92.71,77.47 93.34,78.11 101.6,78.11 v101.6,77.47
  Bottom 0.254: v101.6,77.47 102.23,76.83 142.88,76.83 144.78,74.93 144.78,51.44 142.88,51.44 IC11.12
N$42  (via drill 0.61)
  Top 0.254: v73.02,59.69 73.66,59.05 v73.66,15.24 | v144.78,15.24 144.78,48.26 IC11.11
  Bottom 0.254: IC10.12 95.25,60.33 94.61,60.33 93.98,60.96 83.19,60.96 82.55,60.33 73.66,60.33 v73.02,59.69 | v144.78,15.24 v73.66,15.24
N$43  (via drill 0.61)
  Top 0.254: IC3.7 67.31,38.1 68.58,39.37 68.58,59.69 v69.21,60.33
  Bottom 0.254: v69.21,60.33 69.85,60.96 81.91,60.96 82.55,61.59 95.25,61.59 97.79,59.05 IC10.11
N$44  (via drill 0.61)
  Top 0.254: v64.77,34.29 IC3.6
  Bottom 0.254: v64.77,34.29 21.59,34.29 16.51,39.37 16.51,60.96 30.48,60.96 IC4.5
N$45  (via drill 0.61)
  Top 0.254: v146.69,99.69 142.24,104.14 3.17,104.14 3.17,76.83 IC21.5
  Bottom 0.254: IC21.5 3.17,73.03 3.17,66.04 33.02,66.04 IC4.6 | IC11.1 119.38,40.64 115.57,40.64 114.3,39.37 114.3,38.1 142.24,38.1 146.69,42.55 v146.69,99.69
N$46  (via drill 0.61)
  Top 0.254: IC7.21 28.57,18.41 28.57,23.5 29.21,24.13 29.21,34.92 27.94,36.2 IC12.21 | IC18.11 86.99,13.34 86.99,18.41 86.36,19.05 v86.36,39.37
  Bottom 0.254: v86.36,39.37 83.19,42.55 66.67,42.55 66.04,41.91 66.04,38.73 29.84,38.73 IC12.21
N$47  (via drill 0.61)
  Top 0.254: IC7.23 23.5,18.41 23.5,23.5 24.13,24.13 24.13,39.37 IC12.23 | IC18.12 84.45,12.06 84.45,6.99 83.82,6.35 83.82,3.81 83.19,3.17 78.74,3.17 78.74,30.48 v74.93,34.29
  Bottom 0.254: v74.93,34.29 71.12,38.1 25.4,38.1 IC12.23
N$48  (via drill 0.61)
  Top 0.254: IC7.24 20.95,18.41 20.95,23.5 21.59,24.13 21.59,39.37 IC12.24 | v82.55,17.78 IC18.13 | v67.94,22.23 66.04,24.13 v66.04,36.83
  Bottom 0.254: v82.55,17.78 78.1,22.23 v67.94,22.23 | v66.04,36.83 65.41,37.47 23.5,37.47 IC12.24
N$49  (via drill 0.61)
  Top 0.254: IC7.25 18.41,18.41 18.41,23.5 19.05,24.13 19.05,39.37 IC12.25 | v80.01,19.05 IC18.14 | v50.8,18.41 47.62,15.24 v47.62,13.97
  Bottom 0.254: v80.01,19.05 61.6,19.05 60.96,19.68 60.33,19.68 59.05,18.41 v50.8,18.41 | v47.62,13.97 21.59,13.97 IC7.25
N$50
  Top 0.254: IC7.26 15.88,18.41 15.88,23.5 16.51,24.13 16.51,39.37 IC12.26
  Bottom 0.254: IC17.11 64.14,10.79 65.41,10.79 66.04,11.43 66.04,17.14 45.09,17.14 43.82,15.88 37.47,15.88 36.83,16.51 36.83,19.68 17.14,19.68 IC7.26
N$51  (via drill 0.61)
  Top 0.254: IC7.1 8.89,3.81 8.89,24.13 IC12.1 | IC17.12 58.42,11.43 58.42,3.81 57.79,3.17 50.8,3.17 v50.8,6.99
  Bottom 0.254: v50.8,6.99 14.61,6.99 IC7.1
N$52  (via drill 0.61)
  Top 0.254: IC7.2 11.43,3.81 11.43,22.86 12.7,24.13 IC12.2 | IC17.13 58.42,13.97 v58.42,22.23
  Bottom 0.254: v58.42,22.23 57.15,23.5 14.61,23.5 IC12.2
N$53  (via drill 0.61)
  Top 0.254: IC7.3 13.97,3.81 13.97,24.13 IC12.3 | v54.61,7.62 IC17.14
  Bottom 0.254: v54.61,7.62 53.34,6.35 53.34,3.17 45.09,3.17 43.82,4.45 17.14,4.45 IC7.3
N$54
  Top 0.254: IC7.4 16.51,3.81 16.51,22.86 17.78,24.13 IC12.4
N$55
  Top 0.254: IC7.5 19.05,3.81 19.05,22.86 20.32,24.13 IC12.5
N$56
  Top 0.254: IC7.6 21.59,3.81 21.59,22.86 22.86,24.13 IC12.6
N$57
  Top 0.254: IC7.7 24.13,3.81 24.13,22.86 25.4,24.13 IC12.7
N$58
  Top 0.254: IC7.8 26.67,3.81 26.67,24.13 IC12.8
N$59
  Top 0.254: IC7.9 29.21,3.81 29.21,22.86 30.48,24.13 IC12.9
N$60
  Top 0.254: IC7.10 31.75,3.81 31.75,24.13 IC12.10
N$61  (via drill 0.61)
  Top 0.254: IC13.3 105.41,6.35 v105.41,40.01 v105.41,56.52 | IC5.18 82.55,72.39 82.55,60.96 83.82,59.69 83.82,48.9 87.63,45.09 IC8.15
  Bottom 0.254: v105.41,40.01 104.77,40.64 90.17,40.64 IC8.15 | IC6.3 122.55,56.52 v105.41,56.52
N$62  (via drill 0.61)
  Top 0.254: IC13.1 98.42,5.71 98.42,10.79 96.52,12.7 96.52,41.91 IC8.11 99.06,44.45 v99.06,60.33 99.06,71.12 v97.79,72.39
  Bottom 0.254: IC5.19 80.01,72.39 v97.79,72.39 | IC6.2 120.02,60.33 v99.06,60.33
N$63  (via drill 0.61)
  Top 0.254: IC13.6 110.49,6.35 110.49,17.78 109.22,19.05 v109.22,38.73 | v77.47,38.1 76.2,39.37 v76.2,62.23
  Bottom 0.254: v109.22,38.73 108.58,38.1 v77.47,38.1 | v76.2,62.23 51.44,62.23 48.26,65.41 48.26,66.67 50.17,66.67 IC15.2
N$64  (via drill 0.61)
  Top 0.254: v135.89,102.23 135.26,102.87 71.75,102.87 71.75,97.79 60.96,87 60.96,69.85 IC15.6
  Bottom 0.254: IC13.8 114.94,13.34 145.42,13.34 150.5,18.41 150.5,102.23 v135.89,102.23
N$65  (via drill 0.61)
  Top 0.254: IC16.11 33.66,57.78 33.66,54.61 34.29,53.98 34.29,24.13 v38.1,20.32 | v74.93,20.32 76.2,19.05 76.2,3.81 77.47,2.54 91.44,2.54 91.44,6.35 92.08,6.99 97.79,6.99 97.79,3.81 98.42,3.17 107.95,3.17 107.95,11.43 IC13.10
  Bottom 0.254: v38.1,20.32 39.37,19.05 40.01,19.68 56.52,19.68 57.15,19.05 58.42,19.05 59.69,20.32 71.75,20.32 72.39,19.68 74.3,19.68 v74.93,20.32
N$66  (via drill 0.61)
  Top 0.254: IC16.15 18.41,62.87 v18.41,74.93 | v77.47,83.19 82.55,78.11 v82.55,73.66 | v101.6,70.48 101.6,32.38 99.06,29.84 99.06,15.24 100.33,13.97 100.33,11.43 100.96,10.79 104.14,10.79 IC13.12
  Bottom 0.254: v18.41,74.93 26.67,83.19 v77.47,83.19 | v82.55,73.66 98.42,73.66 v101.6,70.48
N$67  (via drill 0.61)
  Top 0.254: IC5.12 93.98,71.12 95.25,69.85 v95.25,64.14 | v107.95,21.59 107.95,30.48 106.68,31.75 106.68,38.73 107.31,39.37 107.31,62.23 107.95,62.87 v107.95,64.14
  Bottom 0.254: IC9.6 99.69,22.23 107.95,22.23 | 107.95,22.23 113.66,22.23 IC14.3 | v95.25,64.14 v107.95,64.14 133.99,64.14 IC6.9 | v107.95,21.59 107.95,22.23
N$68  (via drill 0.61)
  Top 0.254: v48.26,40.01 48.26,17.14 46.36,15.24 46.36,5.08 50.17,1.27 115.57,1.27 115.57,17.78 IC14.2
  Bottom 0.254: IC16.2 20.95,52.7 19.68,52.7 19.05,52.07 19.05,42.55 44.45,42.55 46.99,40.01 v48.26,40.01
N$69  (via drill 0.61)
  Top 0.254: v33.02,53.98 IC16.6 | v116.84,53.34 116.84,21.59 IC14.4
  Bottom 0.254: v33.02,53.98 33.66,53.34 v116.84,53.34
N$71
  Bottom 0.254: IC17.15 56.52,8.26 69.21,8.26 69.85,7.62 74.93,7.62 IC18.2
N$73  (via drill 0.61)
  Top 0.254: v63.5,6.99 63.5,3.81 64.14,3.17 66.04,3.17 66.04,11.43 IC17.9
  Bottom 0.254: IC17.9 68.58,11.43 73.66,11.43 74.3,10.79 90.8,10.79 IC18.9 | IC19.2 8.89,58.42 8.89,10.79 52.71,10.79 56.52,6.99 v63.5,6.99
N$74  (via drill 0.61)
  Top 0.254: IC16.9 36.83,59.69 v36.83,66.04
  Bottom 0.254: v36.83,66.04 40.01,69.22 47.62,69.22 48.9,70.48 62.87,70.48 IC15.7
N$75
  Bottom 0.254: IC21.6 6.35,73.66 33.02,73.66 IC4.9
N$78  (via drill 0.61)
  Top 0.254: IC20.1 45.09,51.44 45.09,56.52 45.72,57.15 v45.72,70.48
  Bottom 0.254: v45.72,70.48 45.09,71.12 IC4.8
VCC  (via drill 0.61)
  Top 0.254: IC1.20 118.11,97.79 118.11,83.82 IC2.20 118.11,81.28 118.11,67.31 IC6.20 120.65,64.77 IC11.20 | v110.49,49.53 IC14.14 | IC10.20 74.93,73.66 73.66,74.93 IC5.20 | IC16.7 34.93,51.44 34.93,56.52 34.29,57.15 v34.29,60.33 | IC7.28 10.79,18.41 10.79,23.5 11.43,24.13 11.43,39.37 IC12.28 10.16,62.23 10.79,62.87 | 10.79,62.87 IC19.14 | IC21.14 10.79,83.19 v10.79,71.12 10.79,62.87 | IC17.1 IC17.16 52.07,15.24 IC3.1 | IC18.10 IC18.7 | IC9.16 83.82,29.21 83.82,41.91 IC8.16 | IC17.10 IC17.7 | IC18.16 IC18.1
  Bottom 0.254: IC11.20 v110.49,49.53 | IC15.16 52.07,73.66 71.12,73.66 IC5.20 | IC16.16 22.22,60.33 v34.29,60.33 36.83,60.33 | 42.55,60.33 36.83,60.33 | IC20.20 42.55,60.33 | 36.83,60.33 36.83,64.77 34.93,66.67 27.3,66.67 IC4.14 v10.79,71.12 | IC10.20 69.85,58.42 67.94,60.33 42.55,60.33 | IC13.14 95.25,12.7 93.34,14.61 92.08,14.61 IC18.10 88.27,14.61 76.83,14.61 IC18.16 72.39,12.7 72.39,15.24 73.66,16.51 83.82,16.51 83.82,21.59 84.45,22.23 85.09,22.23 85.09,22.86 | IC17.7 66.67,6.99 73.02,6.99 IC18.1 | 85.09,22.86 IC9.16 | IC17.10 62.87,14.61 51.44,14.61 IC17.16 15.24,12.7 IC7.28 | IC14.14 108.58,29.84 102.23,29.84 101.6,29.21 101.6,25.4 106.68,25.4 107.95,24.13 107.95,22.86 85.09,22.86